# Altium PCB PCB.PcbDoc
Units mm, origin at the board's own origin, x right, y up, seen from the top; angles counter-clockwise.
Board outline 26 x 39 mm, 2 copper layers (Top Layer, Bottom Layer); 15 components, 17 nets, 52 pads, 4 vias.
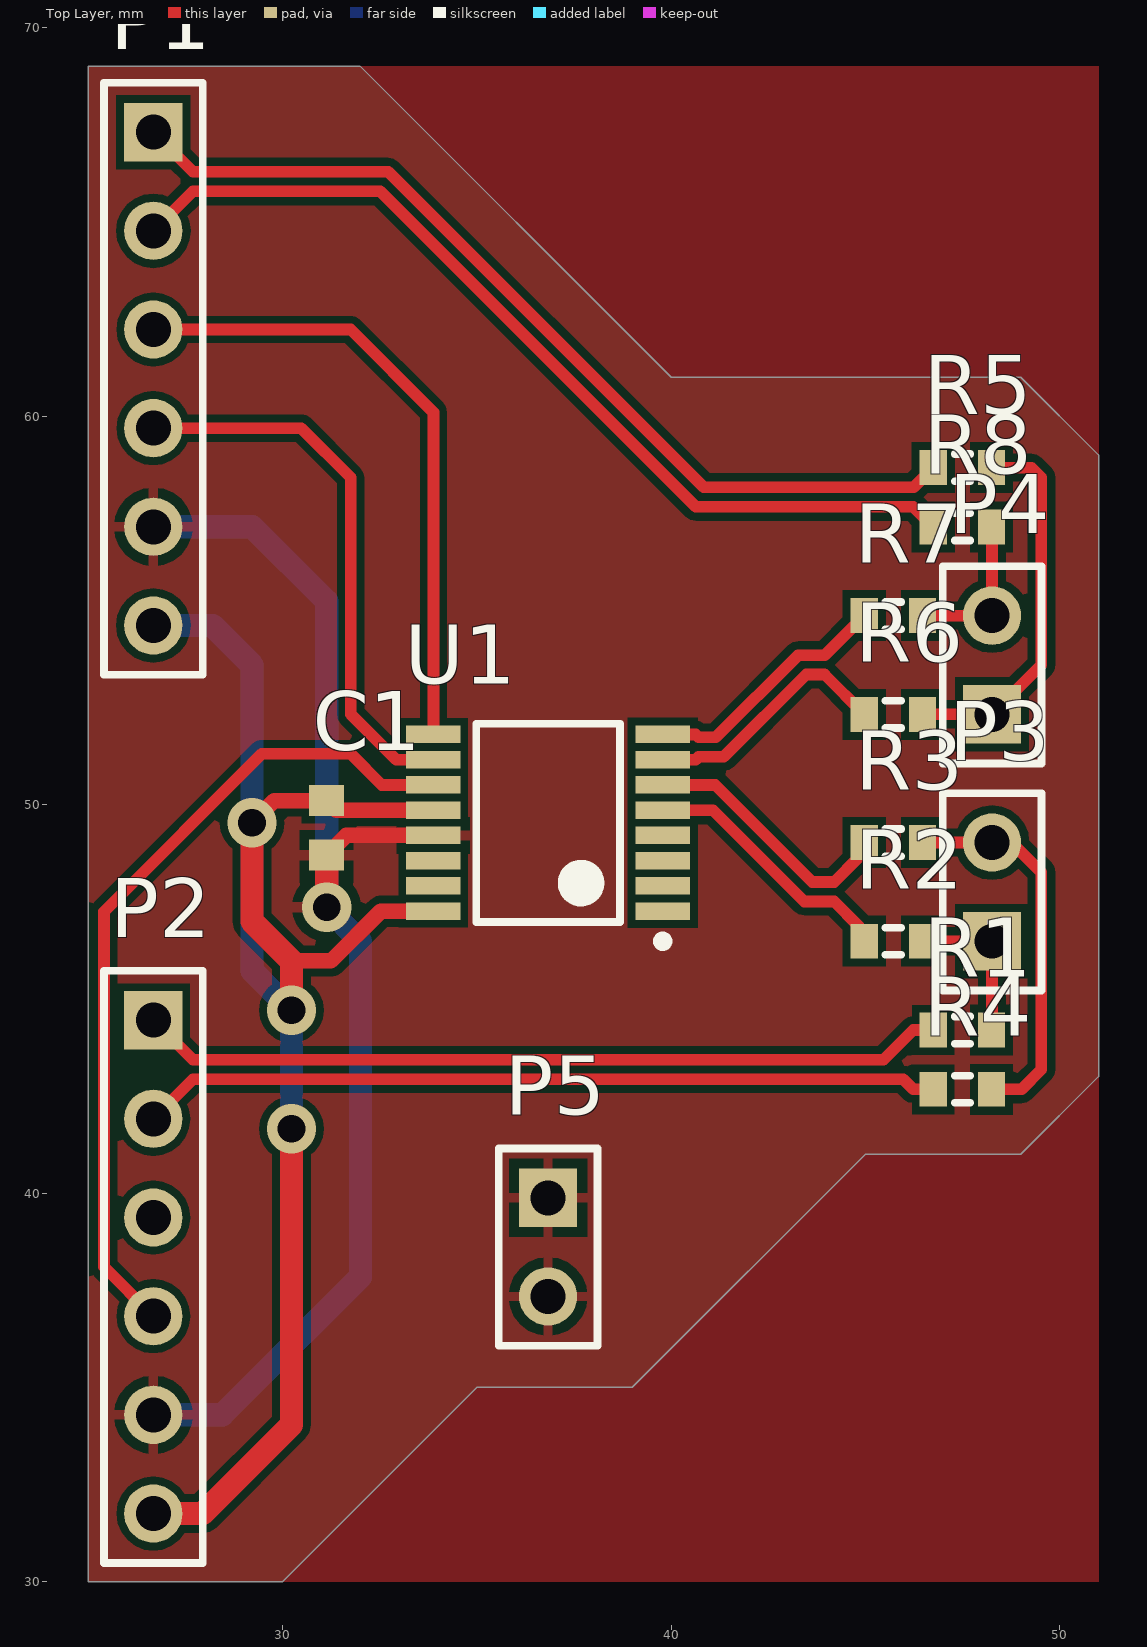
[diagram p0: Top Layer view]
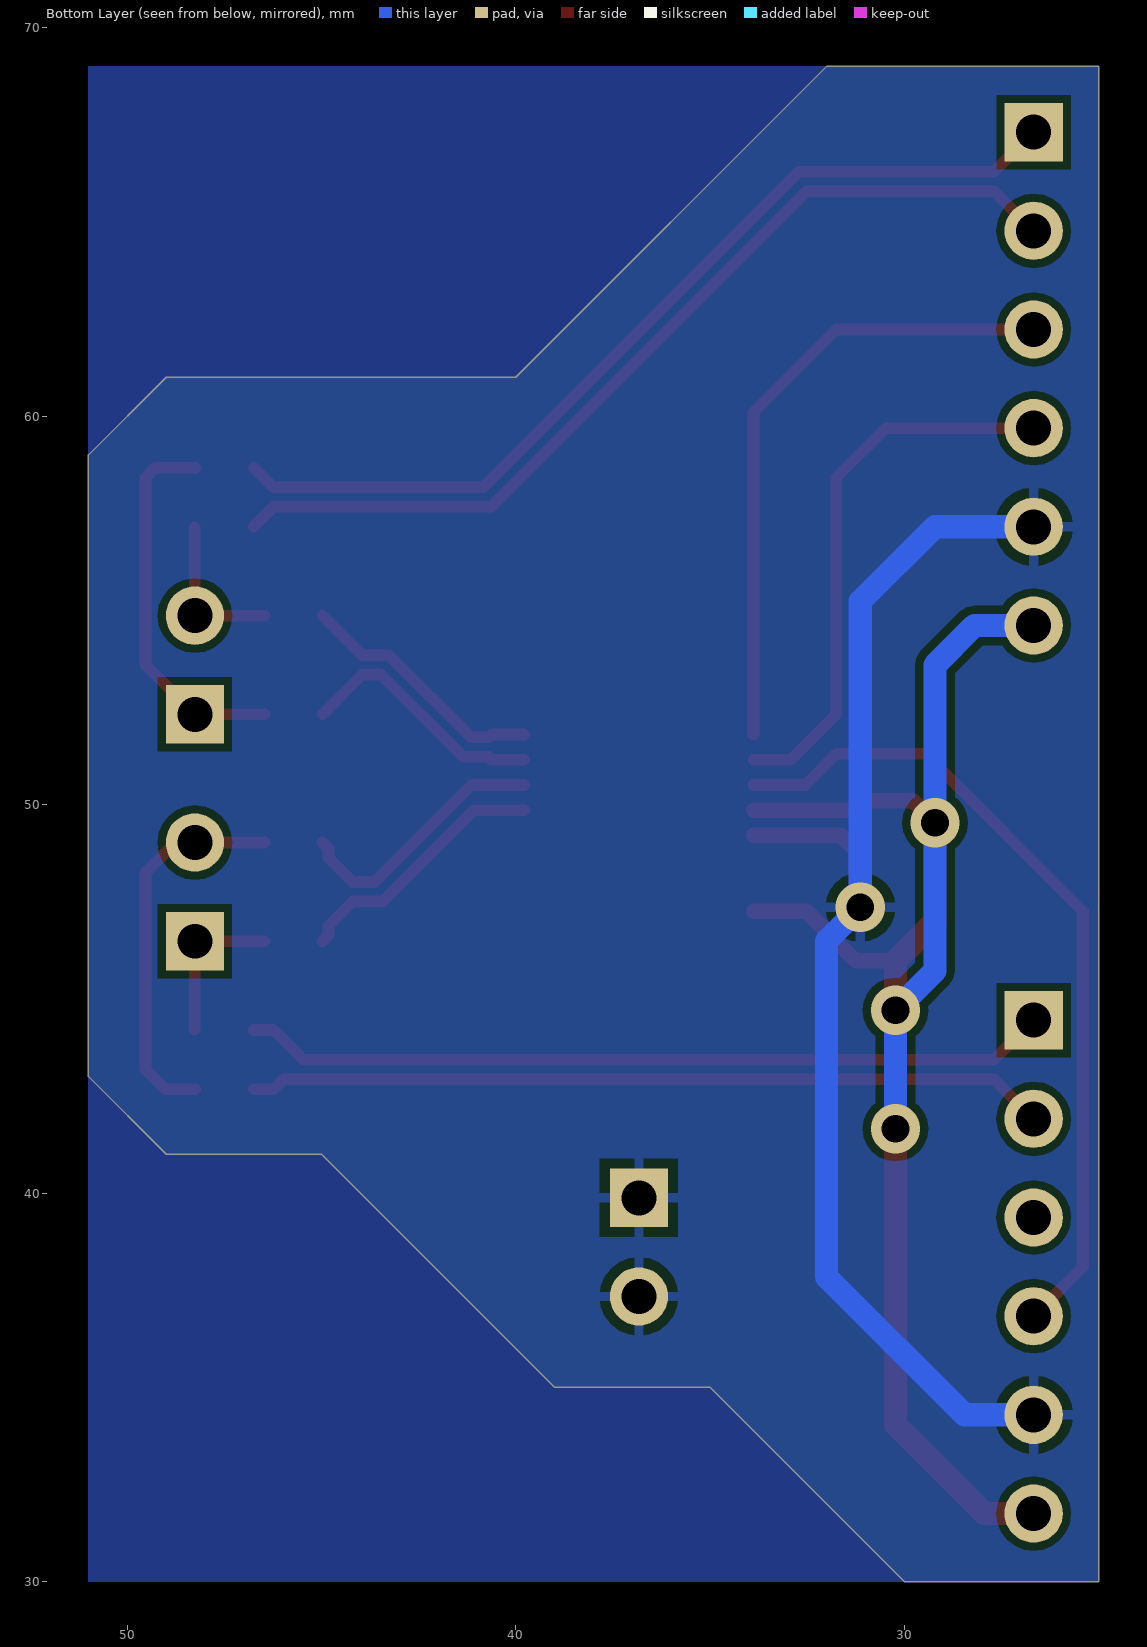
[diagram p1: Bottom Layer view, seen from below]

## Layer stack, top to bottom
Top Solder: solder mask 0.0102, Solder Resist, Dk 3.5
Top Layer: signal copper 0.0356
Dielectric 1: dielectric 0.32, FR-4, Dk 4.8
Bottom Layer: signal copper 0.0356
Bottom Solder: solder mask 0.0102, Solder Resist, Dk 3.5

## Board outline
25,30 30,30 35,35 39,35 45,41 49,41 51,43 51,59 49,61 40,61 32,69 25,69

## Design rules (kind name [scope] priority, off if disabled: settings)
Clearance [All] p1: gap=0.2
DiffPairsRouting [All] p1: maxlimit=1 minlimit=0.2 mostfreqgap=0.2 toplayer_minwidth=0.2 toplayer_maxwidth=1 toplayer_prefwidth=0.3 bottomlayer_minwidth=0.2 bottomlayer_maxwidth=1 bottomlayer_prefwidth=0.3 maxuncoupledlength=12.7
PolygonConnect [All] p1: connectstyle=Relief reliefconductorwidth=0.254 reliefentries=4 polygonreliefangle="90 Angle" airgapwidth=0.254
RoomDefinition Sheet1 [InComponentClass('Sheet1')] p1: confinementstyle=ConfineOut formatcopy=TRUE lockcomponents=FALSE outline 76.61,37.708 144.047,37.708 144.047,55.996 76.61,55.996
RoutingVias [All] p1: holewidth=0.9 width=1.3 viastyle="Through Hole" minholewidth=0.4 minwidth=0.8 maxholewidth=2 maxwidth=2.4
SolderMaskExpansion [All] p1: expansion=0.102
UnpouredPolygon [All] p1: allowunpoured=FALSE
Width [All] p1: maxlimit=2 minlimit=0.2 preferedwidth=0.4
28 further rules are at their usual default settings.

## Classes and differential pairs
differential pair DOUT1: +DOUT1_P -DOUT1_N
differential pair DOUT2: +DOUT2_P -DOUT2_N

## Components (designator, comment, footprint, x,y, rotation, side; value= is the part's Value field where it differs from the comment)
C1 "Cap Semi" 1608[0603] 31.13,49.4 r90 top
P1 "Header 6" HDR1X6 26.67,67.31 r270 top
P2 "Header 6" HDR1X6 26.67,44.45 r270 top
P3 "Header 2" HDR1X2 48.26,46.482 r90 top
P4 "Header 2" HDR1X2 48.26,52.324 r90 top
P5 "Header 2" HDR1X2 36.83,39.878 r270 top
R1 "Res3" J1-0603 47.498,44.196 r180 top
R2 "Res3" J1-0603 45.72,46.482 r180 top
R3 "Res3" J1-0603 45.72,49.022 r180 top
R4 "Res3" J1-0603 47.498,42.672 r0 top
R5 "Res3" J1-0603 47.498,58.674 r180 top
R6 "Res3" J1-0603 45.72,52.324 r180 top
R7 "Res3" J1-0603 45.72,54.864 r180 top
R8 "Res3" J1-0603 47.498,57.15 r0 top
U1 "SN65LVDS049" SOP127P600-8N 36.83,49.53 r180 top

## Footprints (in the part's own frame and the unit in brackets; to place one, negate y for a bottom-side part, rotate by r counter-clockwise, add the part's x,y. Pads: shape width x height; smd on the part's side, far side on the other; paste and mask are expansions set on the pad)
1608[0603] [mm] "Chip Capacitor, Body 1.6x0.8mm, IPC High Density"
  rect 0.8x0.9 smd: 1(-0.7,0) 2(0.7,0)
  body extent -0.87,-0.48 0.87,0.48, height 1.3
HDR1X2 [mm] "Connector; Header; 2 Position"
  rect 1.5x1.5 hole 0.9: 1(0,0)
  round 1.5 hole 0.9: 2(2.54,0)
  silkscreen extent -1.27,-1.27 3.81,1.27
HDR1X6 [mm] "Connector; Header; 6 Position"
  rect 1.5x1.5 hole 0.9: 1(0,0)
  round 1.5 hole 0.9: 2(2.54,0) 3(5.08,0) 4(7.62,0) 5(10.16,0) 6(12.7,0)
  silkscreen extent -1.27,-1.27 13.97,1.27
J1-0603 [mm] "Chip Resistor, Body 1.6x0.8mm, IPC High Density"
  rect 0.7x0.9 smd: 1(-0.75,0) 2(0.75,0)
  silkscreen extent -0.2,-0.35 0.2,0.35, body extent -0.85,-0.48 0.85,0.48, height 0.9
SOP127P600-8N [mm]
  rect 1.4x0.45 smd: 1(-2.95,2.275) 2(-2.95,1.625) 3(-2.95,0.975) 4(-2.95,0.325) 5(-2.95,-0.325) 6(-2.95,-0.975) 7(-2.95,-1.625) 8(-2.95,-2.275) 9(2.95,-2.275) 10(2.95,-1.625) 11(2.95,-0.975) 12(2.95,-0.325) 13(2.95,0.325) 14(2.95,0.975) 15(2.95,1.625) 16(2.95,2.275)
  silkscreen extent -3.08,-2.55 1.85,3.17, body extent -2.25,-2.55 2.25,2.55, height 1.2

## Part data
C1: "Capacitor (Semiconductor SIM Model)"
P1 P2: "Header, 6-Pin"
P3 P4 P5: "Header, 2-Pin"
R1 R2 R3 R4 R5 R6 R7 R8: "Resistor"

## Via types
v1: diameter 1.27, hole 0.711, Top Layer to Bottom Layer, 4 vias

## Nets (pads, with @x,y where several pads share a name; then routed paths per layer and width w, separated by ;. In a path a pad name is that pad's centre, name@x,y a point inside that pad or via, vN(x,y) a via of type N, cw(c..) or ccw(c..) an arc to the next point about the centre after c; other vN are vias at no path point)
3V3: C1.2 P1.6 P2.6 U1.12 U1.16 | length 41.9
  Top Layer w0.4: v1(29.21,49.53) 29.78,50.1 C1.2 31.375,49.855 U1.12 ; 30.226,45.974 31.242,45.974 32.523,47.255 U1.16
  Top Layer w0.6: P2.6 27.94,31.75 30.226,34.036 v1(30.226,41.656) ; v1(29.21,49.53) 29.21,46.99 30.226,45.974 v1(30.226,44.704)
  Bottom Layer w0.6: P1.6 28.194,54.61 29.21,53.594 v1(29.21,49.53) 29.21,45.72 v1(30.226,44.704) v1(30.226,41.656)
DIN1: P1.4 U1.10 | length 14.3
  Top Layer w0.3: P1.4 30.48,59.69 31.75,58.42 31.75,52.324 32.919,51.155 U1.10
DIN2: P2.4 U1.11 | length 21.4
  Top Layer w0.3: P2.4 25.4,38.1 25.4,47.244 29.464,51.308 31.75,51.308 32.553,50.505 U1.11
DOUT1_N: R7.2 U1.8 | length 6.5
  Top Layer w0.3: U1.8 40.63,51.805 40.705,51.73 41.148,51.73 43.266,53.848 43.954,53.848 R7.2
DOUT1_P: R6.2 U1.7 | length 6.5
  Top Layer w0.3: U1.7 40.63,51.155 40.705,51.23 41.355,51.23 43.473,53.348 43.946,53.348 R6.2
DOUT2_N: R2.2 U1.5 | length 6.7
  Top Layer w0.3: U1.5 41.077,49.855 43.426,47.506 44.196,47.506 44.82,46.882 44.82,46.632 R2.2
DOUT2_P: R3.2 U1.6 | length 6.8
  Top Layer w0.3: U1.6 41.134,50.505 43.633,48.006 44.196,48.006 44.82,48.63 44.82,48.872 R3.2
GND: C1.1 P1.5 P2.5 P5.1 P5.2 U1.13 | length 34.1
  Top Layer w0.4: C1.1 31.635,49.205 U1.13
  Top Layer w0.6: v1(31.13,47.356) C1.1
  Bottom Layer w0.6: P2.5 28.448,34.29 32.004,37.846 32.004,46.482 v1(31.13,47.356) 31.13,55.23 29.21,57.15 P1.5
NBIAS1: P1.2 R8.1 | length 24.1
  Top Layer w0.3: P1.2 27.69,65.79 32.508,65.79 40.632,57.666 46.232,57.666 R8.1
NBIAS2: P2.1 R1.2 | length 20.8
  Top Layer w0.3: P2.1 27.69,43.43 45.466,43.43 46.232,44.196 R1.2
NEN: P1.3 U1.9 | length 16.4
  Top Layer w0.3: P1.3 31.75,62.23 33.88,60.1 U1.9
NetP3_1: P3.1 R1.1 R2.1 | length 4.1
  Top Layer w0.3: R2.1 P3.1 R1.1@48.26,44.208
NetP3_2: P3.2 R3.1 R4.2 | length 9.9
  Top Layer w0.3: R3.1 P3.2 48.768,49.022 49.53,48.26 49.53,43.18 49.022,42.672 R4.2
NetP4_1: P4.1 R5.1 R6.1 | length 9.8
  Top Layer w0.3: R6.1 P4.1 49.53,53.594 49.53,58.42 49.276,58.674 R5.1
NetP4_2: P4.2 R7.1 R8.2 | length 4.1
  Top Layer w0.3: R7.1 P4.2 R8.2@48.26,57.138
PBIAS1: P1.1 R5.2 | length 24.1
  Top Layer w0.3: P1.1 27.69,66.29 32.715,66.29 40.839,58.166 46.24,58.166 R5.2
PBIAS2: P2.2 R4.1 | length 20.6
  Top Layer w0.3: P2.2 27.69,42.93 45.97,42.93 46.228,42.672 R4.1
pads on no net: P2.3 U1.1 U1.2 U1.3 U1.4 U1.14 U1.15

## Polygon pours and split planes (outlines as drawn)
GND on Bottom Layer "Top Layer-No Net" (solid, pour order 6): 25,30 30,30 51,30 51,69 25,69
GND on Top Layer "Top Layer-No Net" (solid, pour order 8): 25,30 51,30 51,69 25,69

## Silkscreen, mask and mechanical layers (free items; w line width, h text height)
Mechanical 1:
  the board outline again, w0.1